# Altium PCB CM4IOv5.PcbDoc (part 1 of 4)
Units mm, origin at the board's own origin, x right, y up, seen from the top; angles counter-clockwise.
Board outline 160 x 90 mm, 4 copper layers (F.Cu, In1.Cu, In2.Cu, B.Cu); 151 components, 247 nets, 944 pads, 782 vias.
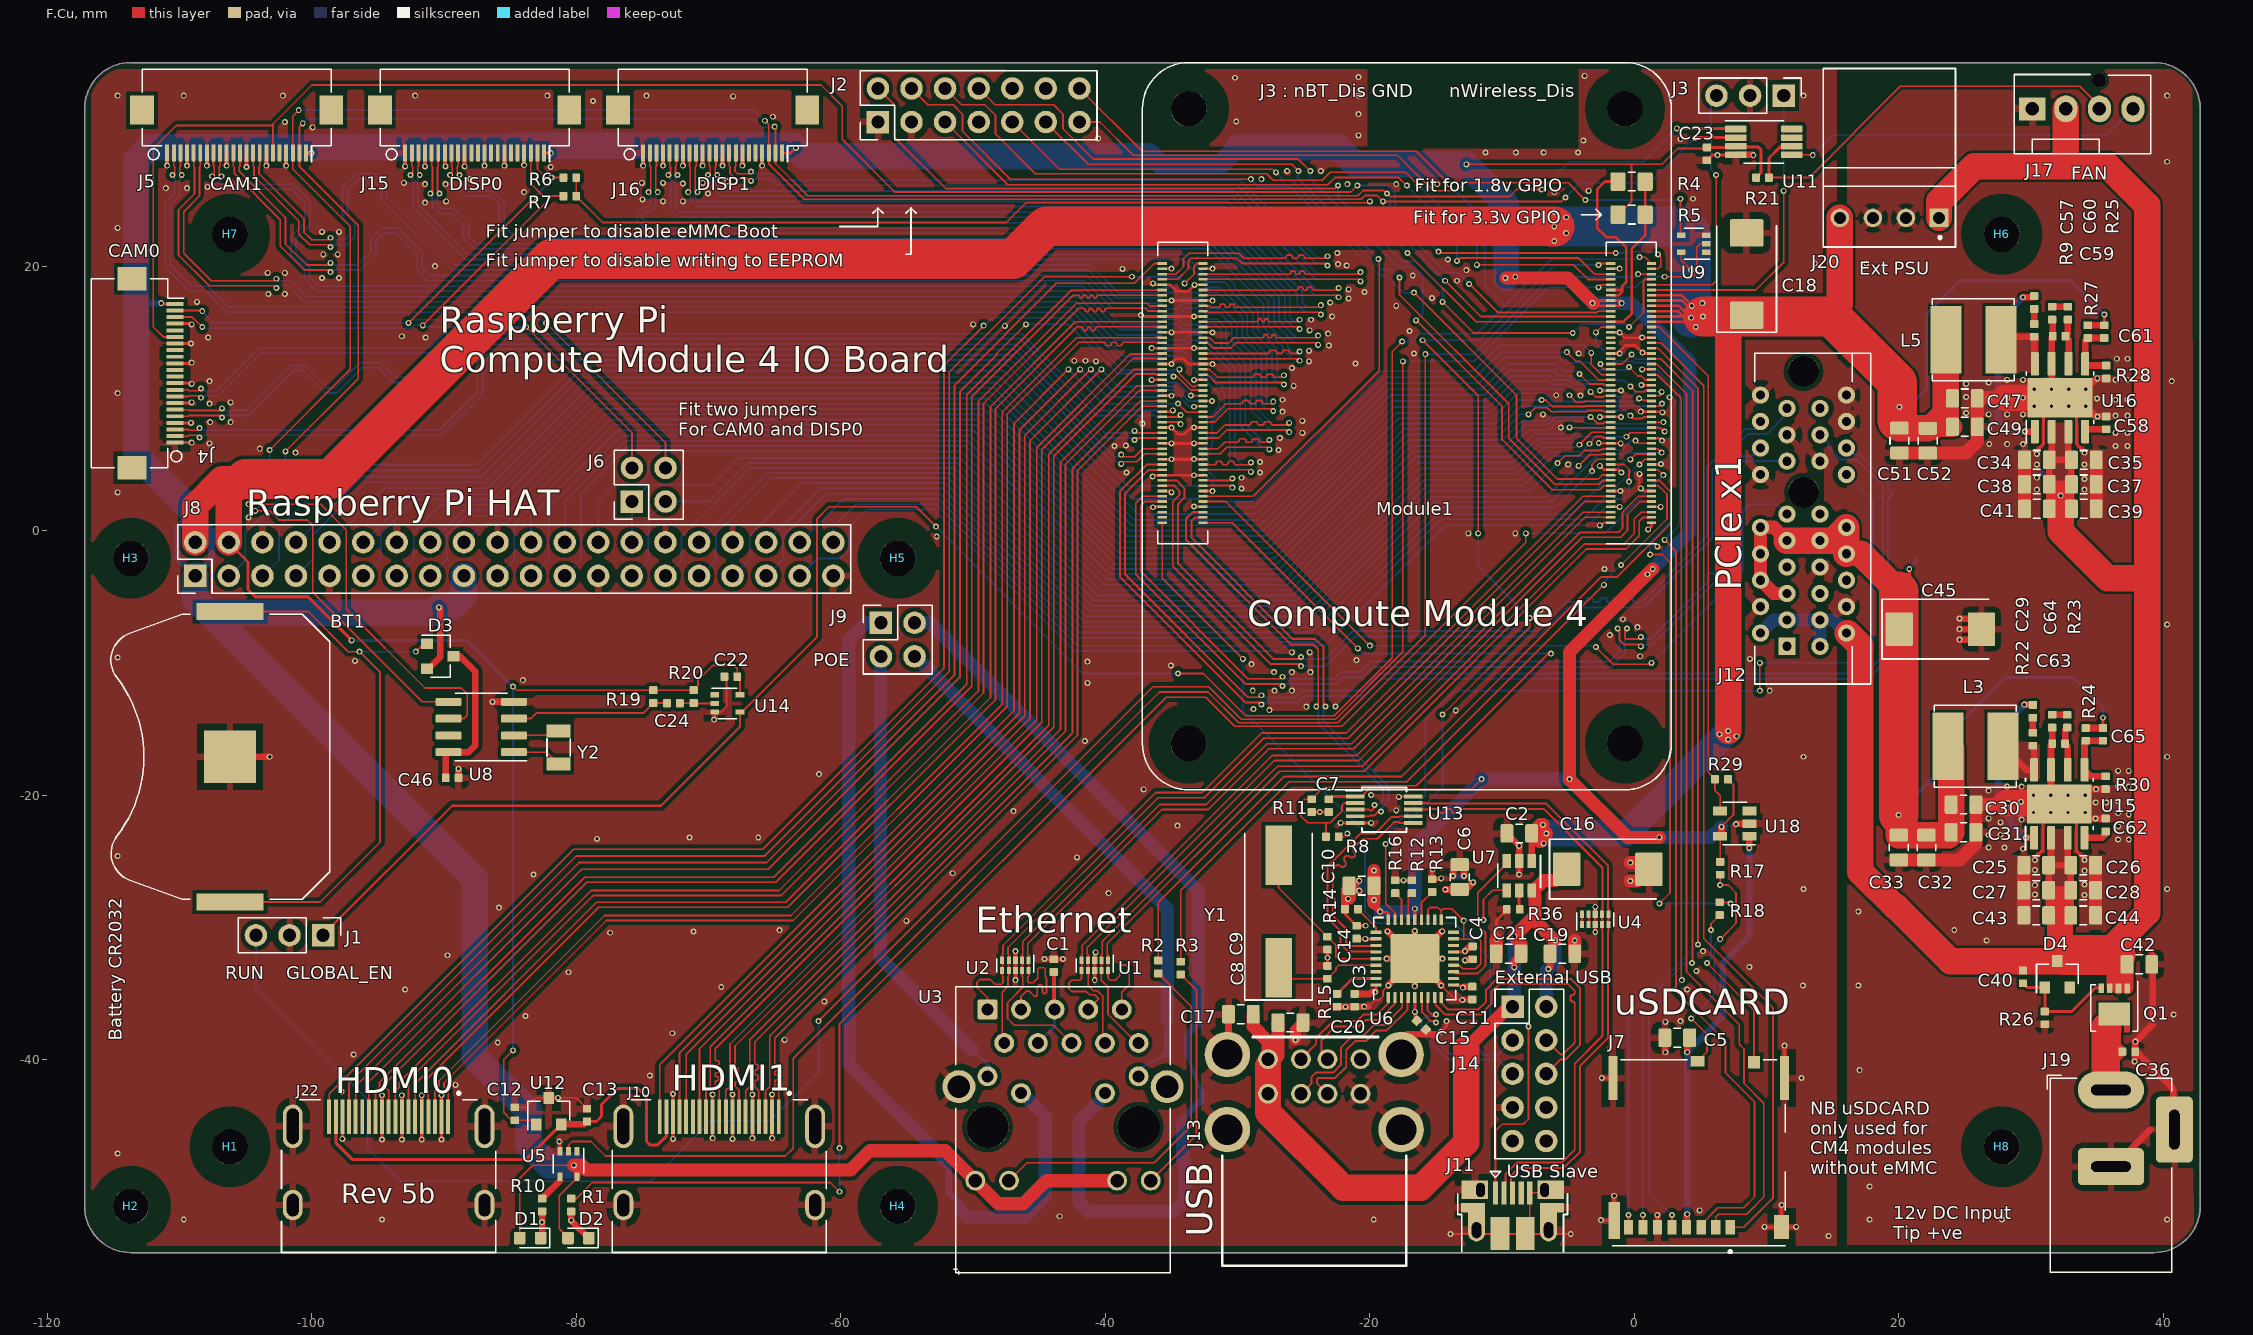
[diagram p0: F.Cu view]
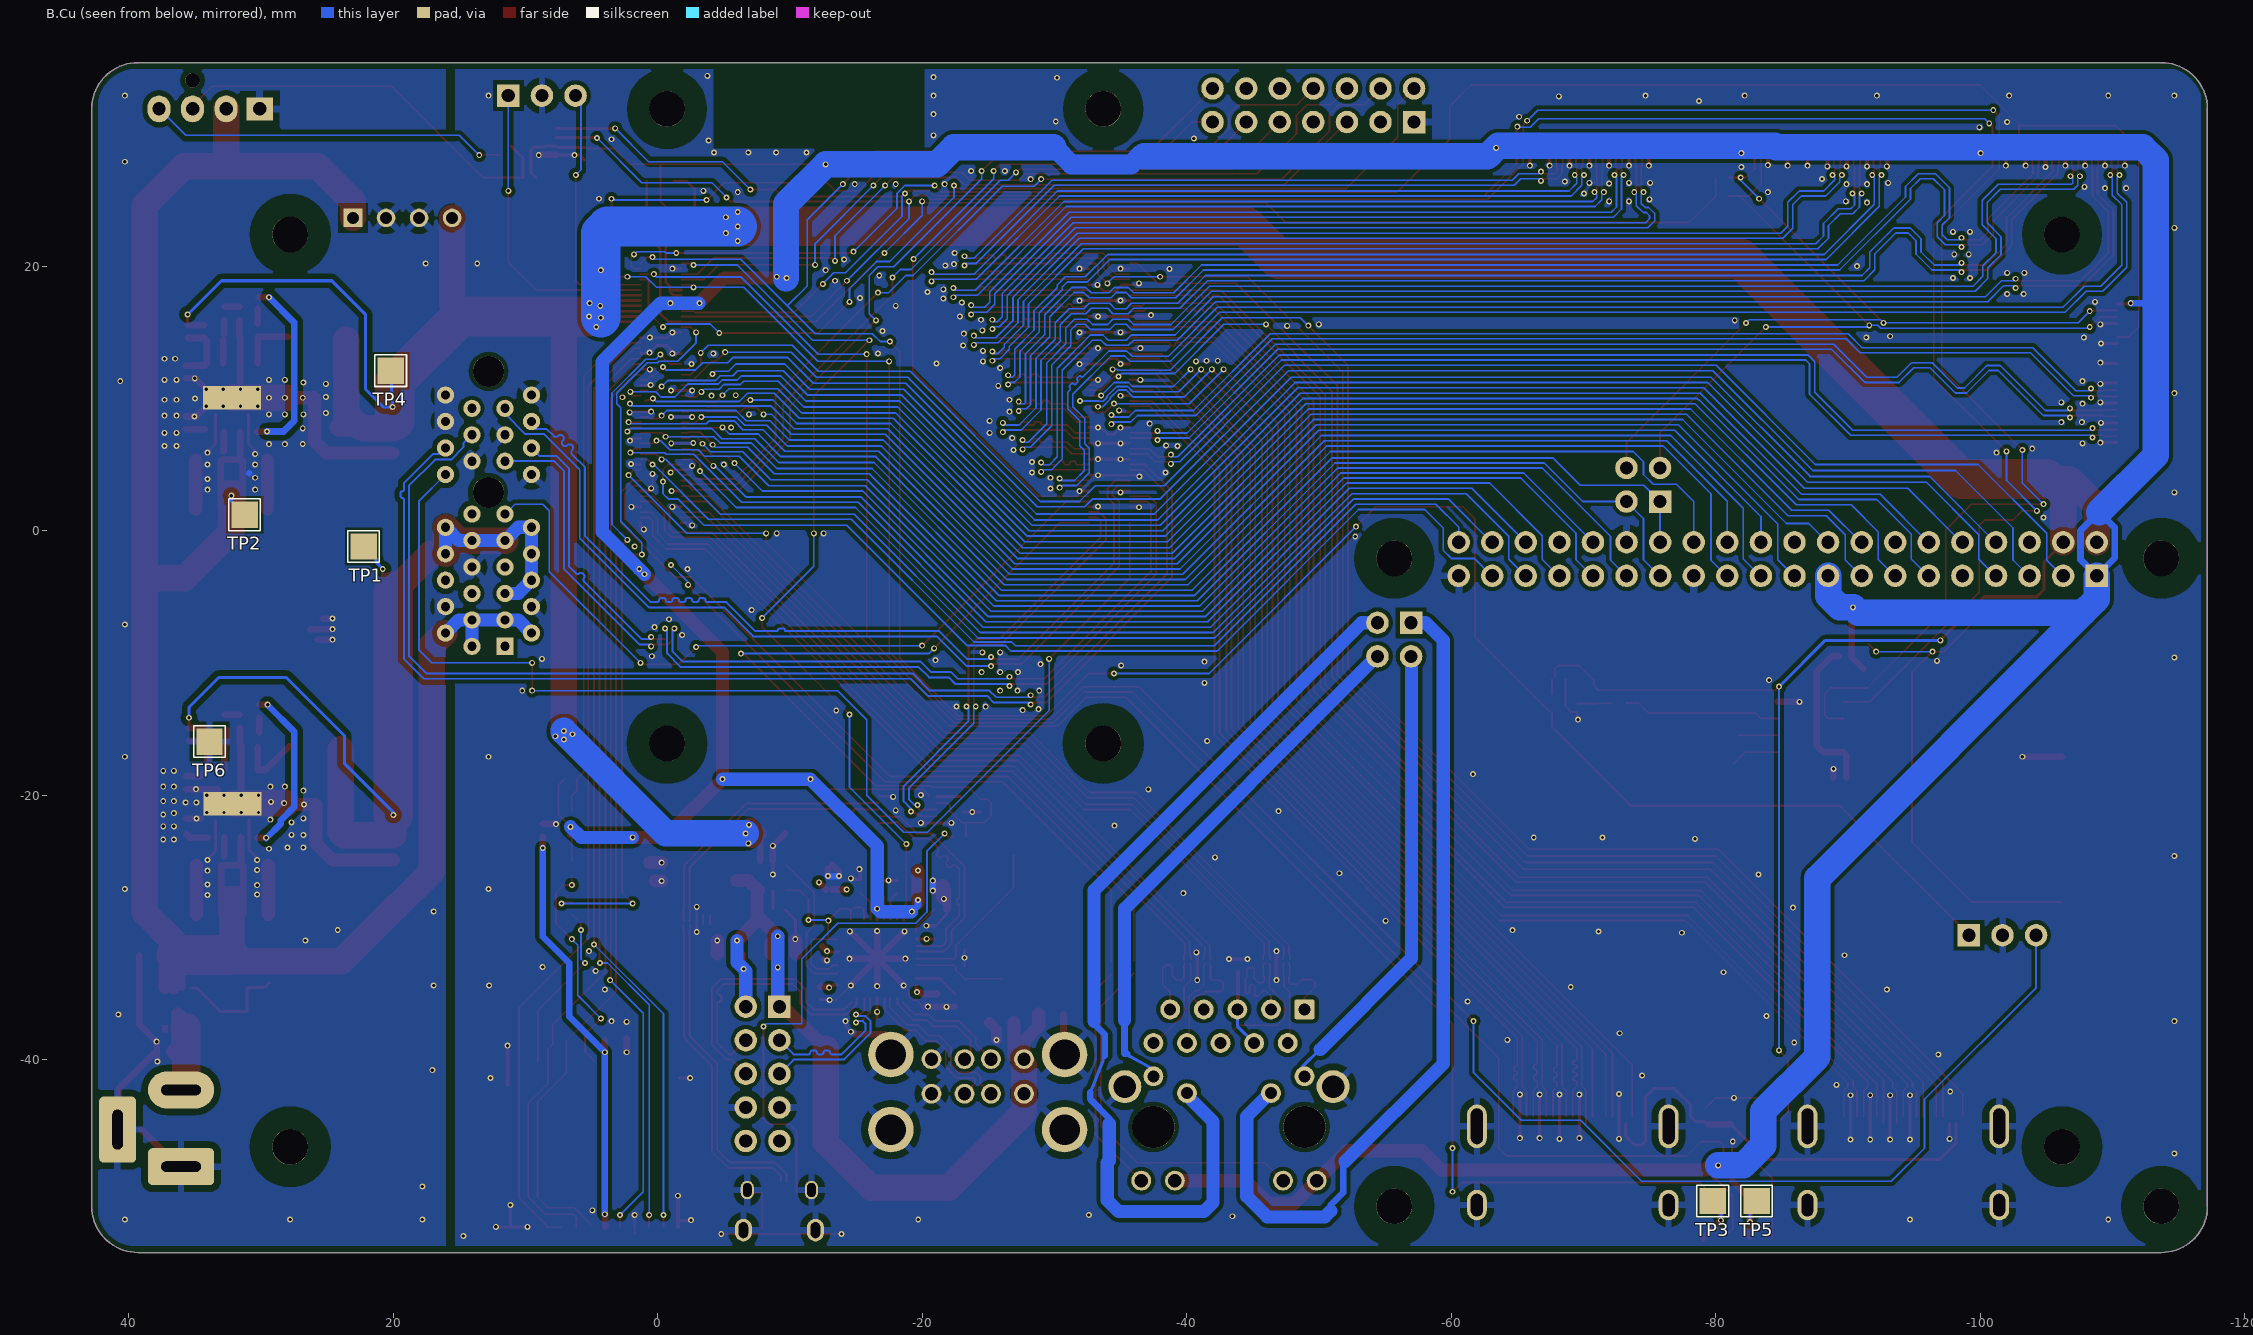
[diagram p1: B.Cu view, seen from below]
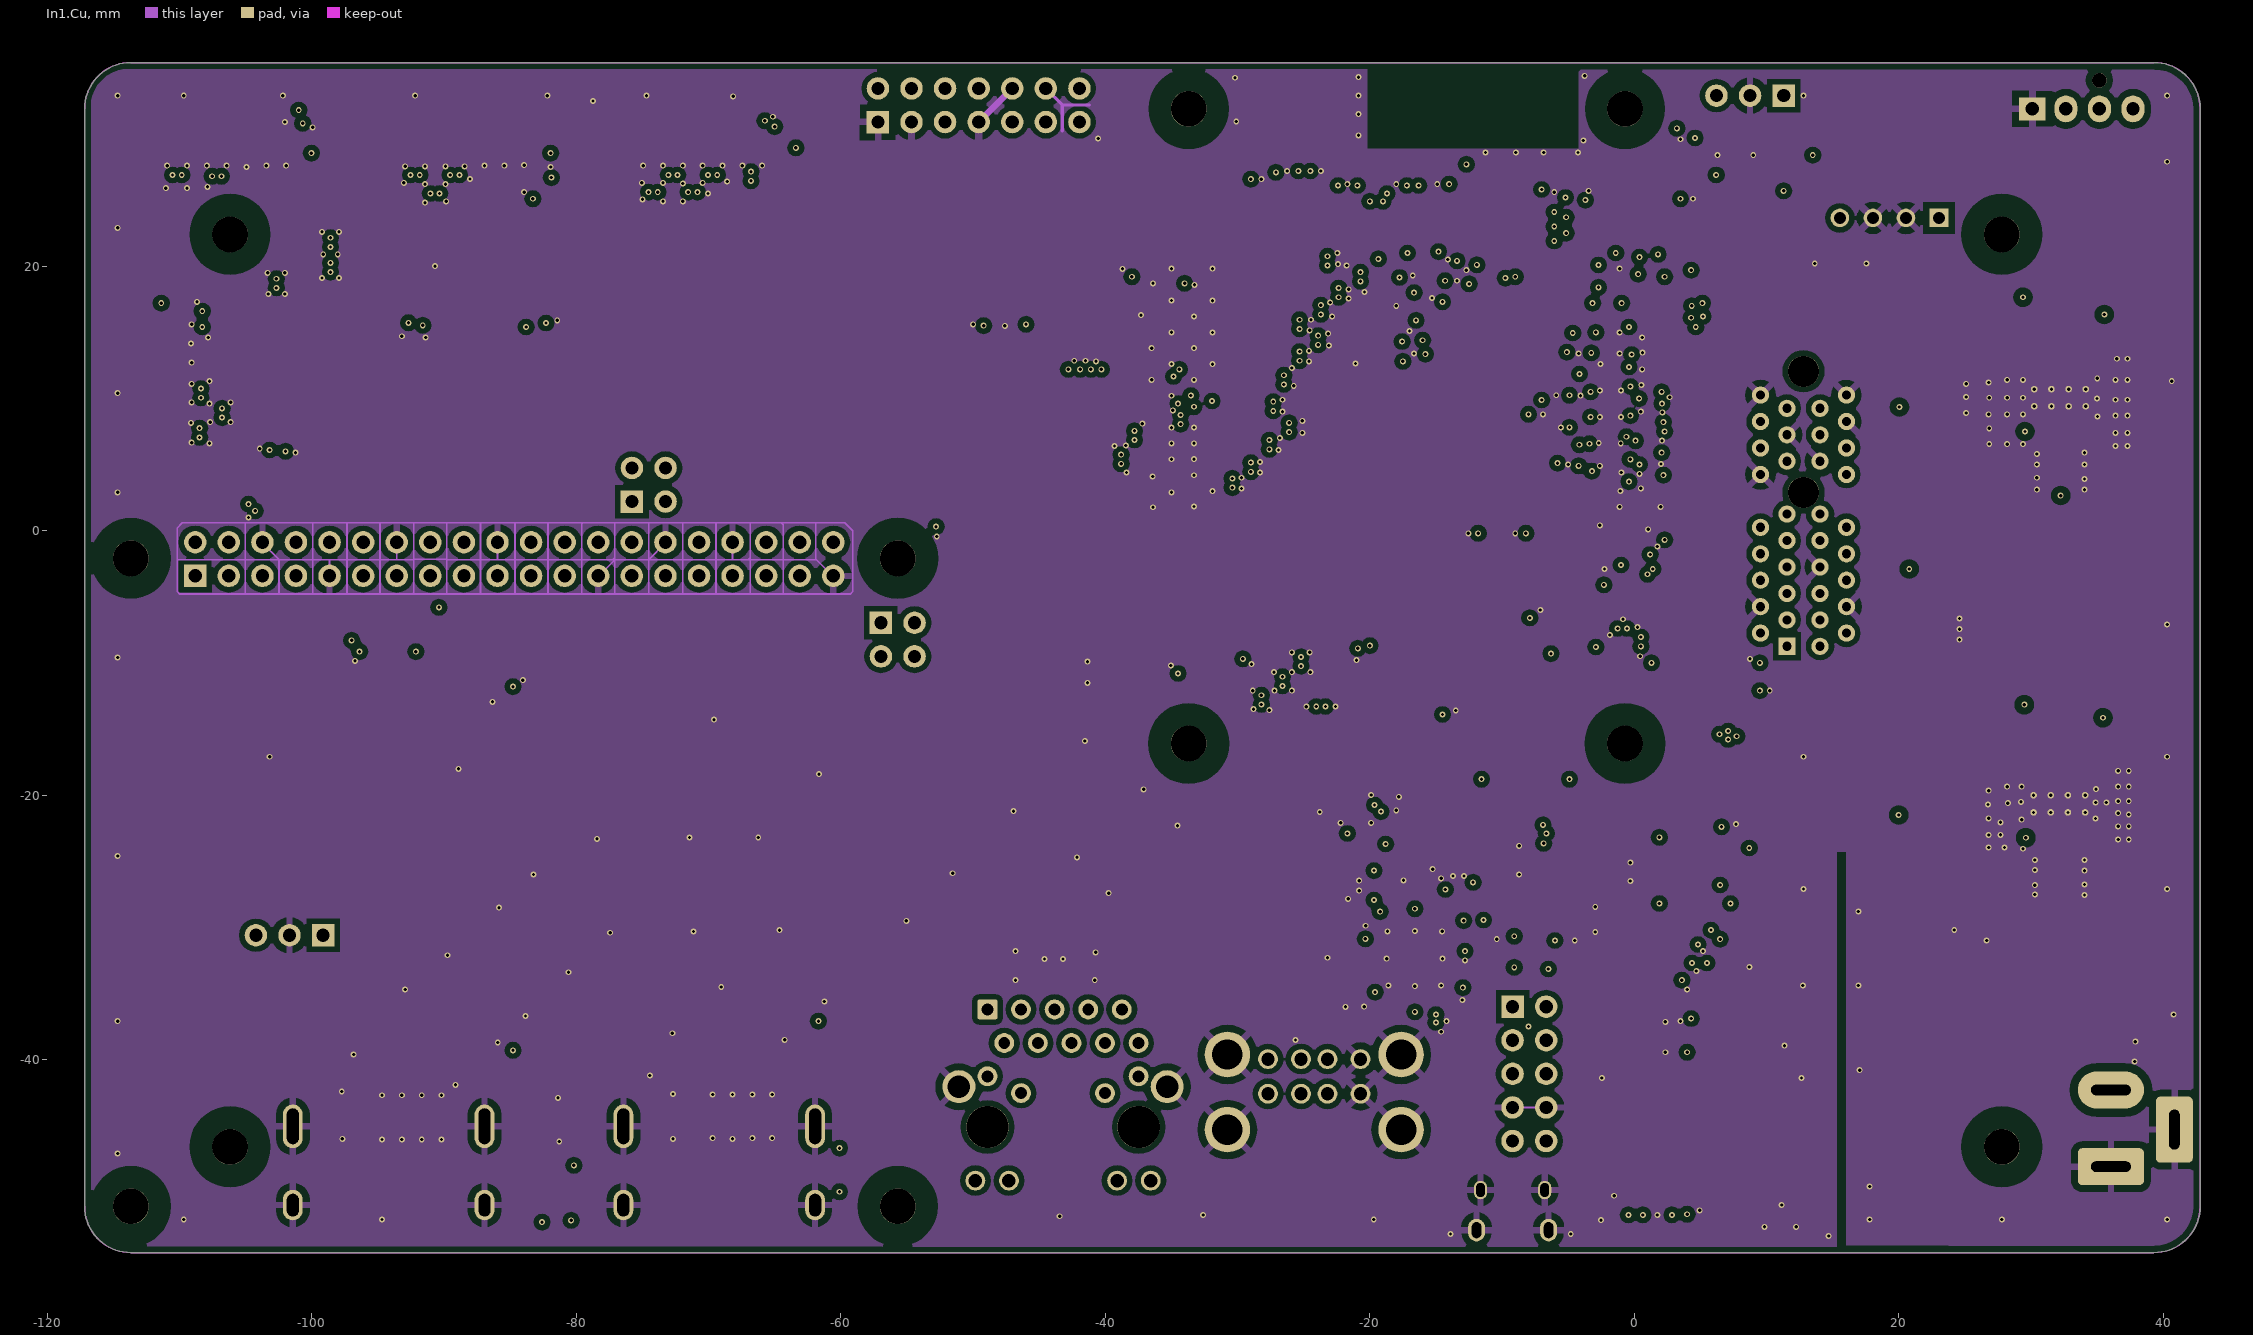
[diagram p2: In1.Cu]
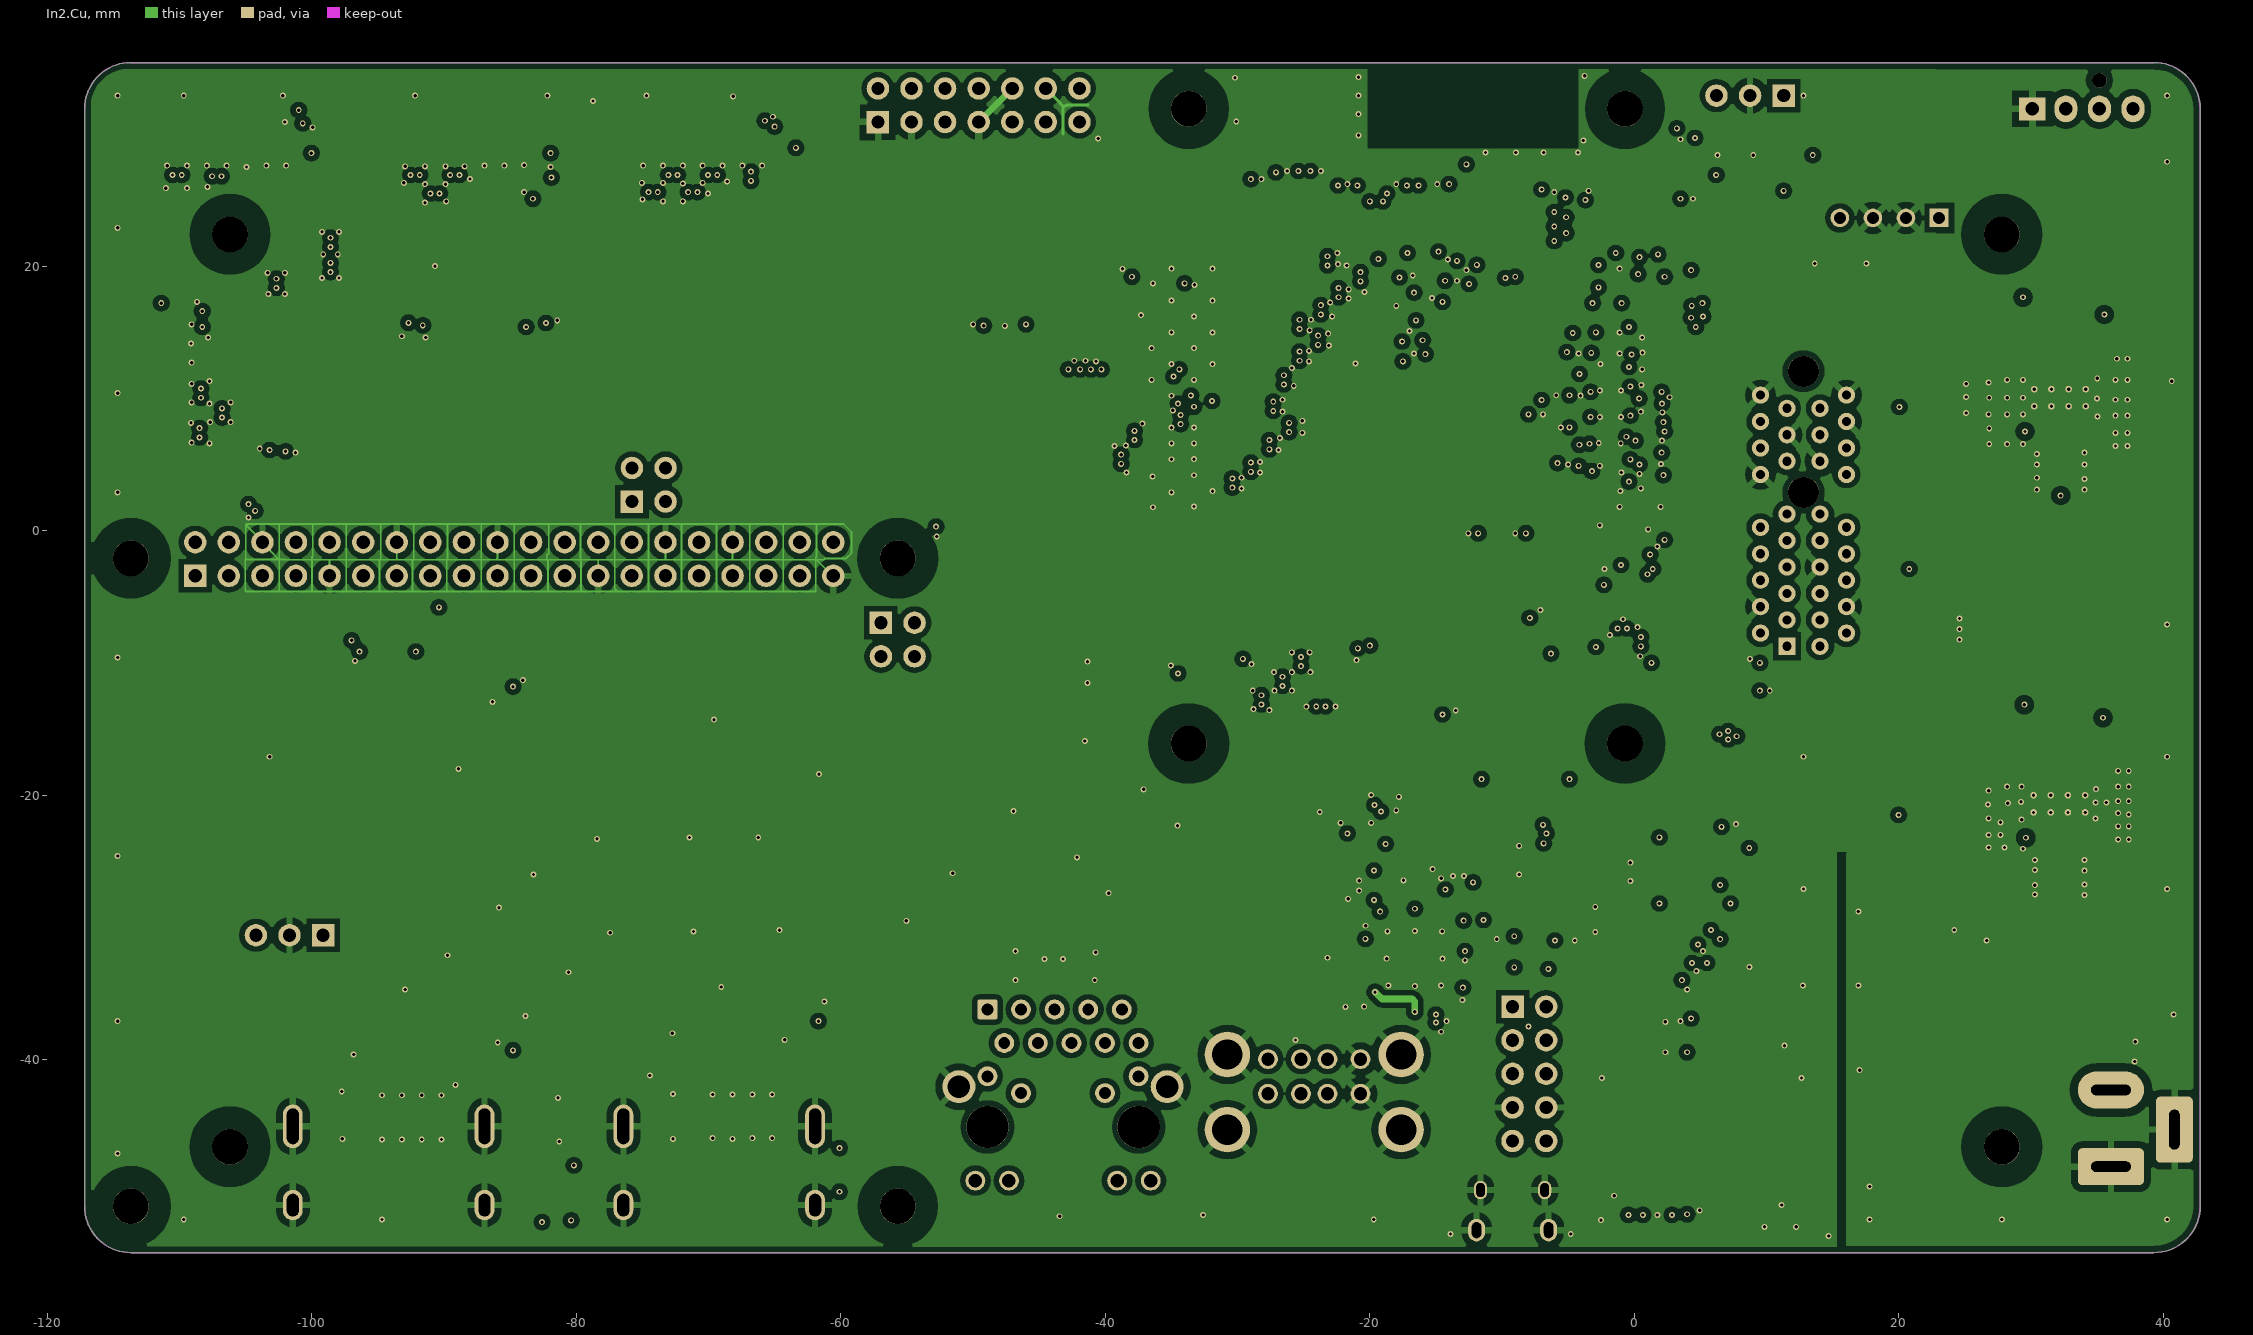
[diagram p3: In2.Cu]

## Layer stack, top to bottom
F.Mask: solder mask 0.0102, Solder Resist, Dk 3.5
F.Cu: signal copper 0.0356
Dielectric 1: dielectric 0.32, FR-4, Dk 4.8
In1.Cu: signal copper 0.0356
Dielectric2: dielectric 0.32, FR-4, Dk 4.8
In2.Cu: signal copper 0.0356
Dielectric3: dielectric 0.32, FR-4, Dk 4.8
B.Cu: signal copper 0.0356
B.Mask: solder mask 0.0102, Solder Resist, Dk 3.5

## Board outline
42.8,-51.1 42.8,31.9 ccw(c39.3,31.9) 39.3,35.4 -113.7,35.4 ccw(c-113.7,31.9) -117.2,31.9 -117.2,-51.1 ccw(c-113.7,-51.1) -113.7,-54.6 39.3,-54.6 ccw(c39.3,-51.1) 42.8,-51.1

## Design rules (kind name [scope] priority, off if disabled: settings)
Clearance "Clearence 1.7_PadClass" [InPadClass('Pad Class Clearance 1.7')] p1: gap=1.7 ignorepadtopadclearanceinfootprint=FALSE
Clearance "Clearence 0.5_Polygon" [InNamedPolygon('In1.Cu-GND') OR InNamedPolygon('In2.Cu-GND')] p2: gap=0.5 ignorepadtopadclearanceinfootprint=FALSE
Clearance "Clearence 0.4_Polygon" [InNamedPolygon('F.Cu-Net-(L5-Pad1)') OR InNamedPolygon('F.Cu-GND') OR InNamedPolygon('F.Cu-Net-(L3-Pad1)') OR InNamedPolygon('F.Cu-/+12v') OR InNamedPolygon('F.Cu-/+12v-1') OR InNamedPolygon('F.Cu-GND-1') OR InNamedPolygon('F.Cu-GND-2') OR InNamedPolygon('F.Cu-GND-4') OR InNamedPolygon('F.Cu-GND-5') OR InNamedPolygon('F.Cu-GND-6') OR InNamedPolygon('F.Cu-GND-8') OR InNamedPolygon('In1.Cu-GND-1') OR InNamedPolygon('In1.Cu-GND-2') OR InNamedPolygon('In1.Cu-GND-3') OR InNamedPolygon('In2.Cu-GND-1') OR InNamedPolygon('In2.Cu-GND-2') OR InNamedPolygon('In2.Cu-/+3.3v') OR InNamedPolygon('In2.Cu-GND-3') OR InNamedPolygon('B.Cu-GND') OR InNamedPolygon('B.Cu-GND-1') OR InNamedPolygon('B.Cu-GND-3') OR InNamedPolygon('B.Cu-GND-4')] p3: gap=0.4 ignorepadtopadclearanceinfootprint=FALSE
Clearance "Clearence 0.3_Polygon" [InNamedPolygon('F.Cu-GND-7') OR InNamedPolygon('B.Cu-GND-2')] p4: gap=0.3 ignorepadtopadclearanceinfootprint=FALSE
Clearance "Clearence 0.2_Polygon" [InNamedPolygon('F.Cu-GND-3')] p5: gap=0.2 ignorepadtopadclearanceinfootprint=FALSE
MinimumSolderMaskSliver [All] p1: minsoldermaskwidth=0
PolygonConnect Polygon_B.Cu-GND-4_ConnectDirect [IsNamedPolygon('B.Cu-GND-4')] p1: connectstyle=Direct reliefconductorwidth=0.254 reliefentries=4 polygonreliefangle="90 Angle" airgapwidth=0.254
PolygonConnect Polygon_B.Cu-GND-3_ConnectDirect [IsNamedPolygon('B.Cu-GND-3')] p2: connectstyle=Direct reliefconductorwidth=0.254 reliefentries=4 polygonreliefangle="90 Angle" airgapwidth=0.254
PolygonConnect Polygon_B.Cu-GND-2_ConnectDirect [IsNamedPolygon('B.Cu-GND-2') vs IsVia] p3: connectstyle=Direct reliefconductorwidth=0.254 reliefentries=4 polygonreliefangle="90 Angle" airgapwidth=0.254
PolygonConnect Polygon_B.Cu-GND-2_ConnectRelief45 [IsNamedPolygon('B.Cu-GND-2') vs (IsThruPin or IsSMTPin) and (PadShape_AllLayers = 'Round')] p4: connectstyle=Relief reliefconductorwidth=0.508 reliefentries=4 polygonreliefangle="45 Angle" airgapwidth=0.508
PolygonConnect Polygon_B.Cu-GND-2_ConnectRelief90 [IsNamedPolygon('B.Cu-GND-2') vs (IsThruPin or IsSMTPin) and (PadShape_AllLayers <> 'Round')] p5: connectstyle=Relief reliefconductorwidth=0.508 reliefentries=4 polygonreliefangle="90 Angle" airgapwidth=0.508
PolygonConnect Polygon_B.Cu-GND-1_ConnectDirect [IsNamedPolygon('B.Cu-GND-1')] p6: connectstyle=Direct reliefconductorwidth=0.254 reliefentries=4 polygonreliefangle="90 Angle" airgapwidth=0.254
PolygonConnect Polygon_B.Cu-GND_ConnectDirect [IsNamedPolygon('B.Cu-GND') vs IsVia] p7: connectstyle=Direct reliefconductorwidth=0.254 reliefentries=4 polygonreliefangle="90 Angle" airgapwidth=0.254
PolygonConnect Polygon_B.Cu-GND_ConnectRelief45 [IsNamedPolygon('B.Cu-GND') vs (IsThruPin or IsSMTPin) and (PadShape_AllLayers = 'Round')] p8: connectstyle=Relief reliefconductorwidth=0.508 reliefentries=4 polygonreliefangle="45 Angle" airgapwidth=0.508
PolygonConnect Polygon_B.Cu-GND_ConnectRelief90 [IsNamedPolygon('B.Cu-GND') vs (IsThruPin or IsSMTPin) and (PadShape_AllLayers <> 'Round')] p9: connectstyle=Relief reliefconductorwidth=0.508 reliefentries=4 polygonreliefangle="90 Angle" airgapwidth=0.508
PolygonConnect Polygon_In2.Cu-GND-3_ConnectDirect [IsNamedPolygon('In2.Cu-GND-3')] p10: connectstyle=Direct reliefconductorwidth=0.254 reliefentries=4 polygonreliefangle="90 Angle" airgapwidth=0.254
PolygonConnect Polygon_In2.Cu-/+3.3v_ConnectDirect [IsNamedPolygon('In2.Cu-/+3.3v') vs IsVia] p11: connectstyle=Direct reliefconductorwidth=0.254 reliefentries=4 polygonreliefangle="90 Angle" airgapwidth=0.254
PolygonConnect Polygon_In2.Cu-/+3.3v_ConnectRelief45 [IsNamedPolygon('In2.Cu-/+3.3v') vs (IsThruPin or IsSMTPin) and (PadShape_AllLayers = 'Round')] p12: connectstyle=Relief reliefconductorwidth=0.508 reliefentries=4 polygonreliefangle="45 Angle" airgapwidth=0.508
PolygonConnect Polygon_In2.Cu-/+3.3v_ConnectRelief90 [IsNamedPolygon('In2.Cu-/+3.3v') vs (IsThruPin or IsSMTPin) and (PadShape_AllLayers <> 'Round')] p13: connectstyle=Relief reliefconductorwidth=0.508 reliefentries=4 polygonreliefangle="90 Angle" airgapwidth=0.508
PolygonConnect Polygon_In2.Cu-GND-2_ConnectDirect [IsNamedPolygon('In2.Cu-GND-2')] p14: connectstyle=Direct reliefconductorwidth=0.254 reliefentries=4 polygonreliefangle="90 Angle" airgapwidth=0.254
PolygonConnect Polygon_In2.Cu-GND-1_ConnectDirect [IsNamedPolygon('In2.Cu-GND-1') vs IsVia] p15: connectstyle=Direct reliefconductorwidth=0.254 reliefentries=4 polygonreliefangle="90 Angle" airgapwidth=0.254
PolygonConnect Polygon_In2.Cu-GND-1_ConnectRelief45 [IsNamedPolygon('In2.Cu-GND-1') vs (IsThruPin or IsSMTPin) and (PadShape_AllLayers = 'Round')] p16: connectstyle=Relief reliefconductorwidth=0.508 reliefentries=4 polygonreliefangle="45 Angle" airgapwidth=0.508
PolygonConnect Polygon_In2.Cu-GND-1_ConnectRelief90 [IsNamedPolygon('In2.Cu-GND-1') vs (IsThruPin or IsSMTPin) and (PadShape_AllLayers <> 'Round')] p17: connectstyle=Relief reliefconductorwidth=0.508 reliefentries=4 polygonreliefangle="90 Angle" airgapwidth=0.508
PolygonConnect Polygon_In2.Cu-GND_ConnectDirect [IsNamedPolygon('In2.Cu-GND') vs IsVia] p18: connectstyle=Direct reliefconductorwidth=0.254 reliefentries=4 polygonreliefangle="90 Angle" airgapwidth=0.254
PolygonConnect Polygon_In2.Cu-GND_ConnectRelief45 [IsNamedPolygon('In2.Cu-GND') vs (IsThruPin or IsSMTPin) and (PadShape_AllLayers = 'Round')] p19: connectstyle=Relief reliefconductorwidth=0.508 reliefentries=4 polygonreliefangle="45 Angle" airgapwidth=0.508
PolygonConnect Polygon_In2.Cu-GND_ConnectRelief90 [IsNamedPolygon('In2.Cu-GND') vs (IsThruPin or IsSMTPin) and (PadShape_AllLayers <> 'Round')] p20: connectstyle=Relief reliefconductorwidth=0.508 reliefentries=4 polygonreliefangle="90 Angle" airgapwidth=0.508
PolygonConnect Polygon_In1.Cu-GND-3_ConnectDirect [IsNamedPolygon('In1.Cu-GND-3') vs IsVia] p21: connectstyle=Direct reliefconductorwidth=0.254 reliefentries=4 polygonreliefangle="90 Angle" airgapwidth=0.254
PolygonConnect Polygon_In1.Cu-GND-3_ConnectRelief45 [IsNamedPolygon('In1.Cu-GND-3') vs (IsThruPin or IsSMTPin) and (PadShape_AllLayers = 'Round')] p22: connectstyle=Relief reliefconductorwidth=0.508 reliefentries=4 polygonreliefangle="45 Angle" airgapwidth=0.508
PolygonConnect Polygon_In1.Cu-GND-3_ConnectRelief90 [IsNamedPolygon('In1.Cu-GND-3') vs (IsThruPin or IsSMTPin) and (PadShape_AllLayers <> 'Round')] p23: connectstyle=Relief reliefconductorwidth=0.508 reliefentries=4 polygonreliefangle="90 Angle" airgapwidth=0.508
PolygonConnect Polygon_In1.Cu-GND-2_ConnectDirect [IsNamedPolygon('In1.Cu-GND-2')] p24: connectstyle=Direct reliefconductorwidth=0.254 reliefentries=4 polygonreliefangle="90 Angle" airgapwidth=0.254
PolygonConnect Polygon_In1.Cu-GND-1_ConnectDirect [IsNamedPolygon('In1.Cu-GND-1')] p25: connectstyle=Direct reliefconductorwidth=0.254 reliefentries=4 polygonreliefangle="90 Angle" airgapwidth=0.254
PolygonConnect Polygon_In1.Cu-GND_ConnectDirect [IsNamedPolygon('In1.Cu-GND') vs IsVia] p26: connectstyle=Direct reliefconductorwidth=0.254 reliefentries=4 polygonreliefangle="90 Angle" airgapwidth=0.254
PolygonConnect Polygon_In1.Cu-GND_ConnectRelief45 [IsNamedPolygon('In1.Cu-GND') vs (IsThruPin or IsSMTPin) and (PadShape_AllLayers = 'Round')] p27: connectstyle=Relief reliefconductorwidth=0.508 reliefentries=4 polygonreliefangle="45 Angle" airgapwidth=0.508
PolygonConnect Polygon_In1.Cu-GND_ConnectRelief90 [IsNamedPolygon('In1.Cu-GND') vs (IsThruPin or IsSMTPin) and (PadShape_AllLayers <> 'Round')] p28: connectstyle=Relief reliefconductorwidth=0.508 reliefentries=4 polygonreliefangle="90 Angle" airgapwidth=0.508
PolygonConnect Polygon_F.Cu-GND-8_ConnectDirect [IsNamedPolygon('F.Cu-GND-8')] p29: connectstyle=Direct reliefconductorwidth=0.254 reliefentries=4 polygonreliefangle="90 Angle" airgapwidth=0.254
PolygonConnect Polygon_F.Cu-GND-7_ConnectDirect [IsNamedPolygon('F.Cu-GND-7') vs IsVia] p30: connectstyle=Direct reliefconductorwidth=0.254 reliefentries=4 polygonreliefangle="90 Angle" airgapwidth=0.254
PolygonConnect Polygon_F.Cu-GND-7_ConnectRelief45 [IsNamedPolygon('F.Cu-GND-7') vs (IsThruPin or IsSMTPin) and (PadShape_AllLayers = 'Round')] p31: connectstyle=Relief reliefconductorwidth=0.508 reliefentries=4 polygonreliefangle="45 Angle" airgapwidth=0.508
PolygonConnect Polygon_F.Cu-GND-7_ConnectRelief90 [IsNamedPolygon('F.Cu-GND-7') vs (IsThruPin or IsSMTPin) and (PadShape_AllLayers <> 'Round')] p32: connectstyle=Relief reliefconductorwidth=0.508 reliefentries=4 polygonreliefangle="90 Angle" airgapwidth=0.508
PolygonConnect Polygon_F.Cu-GND-6_ConnectDirect [IsNamedPolygon('F.Cu-GND-6')] p33: connectstyle=Direct reliefconductorwidth=0.254 reliefentries=4 polygonreliefangle="90 Angle" airgapwidth=0.254
PolygonConnect Polygon_F.Cu-GND-5_ConnectDirect [IsNamedPolygon('F.Cu-GND-5')] p34: connectstyle=Direct reliefconductorwidth=0.254 reliefentries=4 polygonreliefangle="90 Angle" airgapwidth=0.254
PolygonConnect Polygon_F.Cu-GND-4_ConnectDirect [IsNamedPolygon('F.Cu-GND-4')] p35: connectstyle=Direct reliefconductorwidth=0.254 reliefentries=4 polygonreliefangle="90 Angle" airgapwidth=0.254
PolygonConnect Polygon_F.Cu-GND-3_ConnectDirect [IsNamedPolygon('F.Cu-GND-3') vs IsVia] p36: connectstyle=Direct reliefconductorwidth=0.254 reliefentries=4 polygonreliefangle="90 Angle" airgapwidth=0.254
PolygonConnect Polygon_F.Cu-GND-3_ConnectRelief45 [IsNamedPolygon('F.Cu-GND-3') vs (IsThruPin or IsSMTPin) and (PadShape_AllLayers = 'Round')] p37: connectstyle=Relief reliefconductorwidth=0.508 reliefentries=4 polygonreliefangle="45 Angle" airgapwidth=0.4
PolygonConnect Polygon_F.Cu-GND-3_ConnectRelief90 [IsNamedPolygon('F.Cu-GND-3') vs (IsThruPin or IsSMTPin) and (PadShape_AllLayers <> 'Round')] p38: connectstyle=Relief reliefconductorwidth=0.508 reliefentries=4 polygonreliefangle="90 Angle" airgapwidth=0.4
PolygonConnect Polygon_F.Cu-GND-2_ConnectDirect [IsNamedPolygon('F.Cu-GND-2')] p39: connectstyle=Direct reliefconductorwidth=0.254 reliefentries=4 polygonreliefangle="90 Angle" airgapwidth=0.254
PolygonConnect Polygon_F.Cu-GND-1_ConnectDirect [IsNamedPolygon('F.Cu-GND-1')] p40: connectstyle=Direct reliefconductorwidth=0.254 reliefentries=4 polygonreliefangle="90 Angle" airgapwidth=0.254
PolygonConnect Polygon_F.Cu-/+12v-1_ConnectDirect [IsNamedPolygon('F.Cu-/+12v-1')] p41: connectstyle=Direct reliefconductorwidth=0.254 reliefentries=4 polygonreliefangle="90 Angle" airgapwidth=0.254
PolygonConnect Polygon_F.Cu-/+12v_ConnectDirect [IsNamedPolygon('F.Cu-/+12v')] p42: connectstyle=Direct reliefconductorwidth=0.254 reliefentries=4 polygonreliefangle="90 Angle" airgapwidth=0.254
PolygonConnect Polygon_F.Cu-Net-(L3-Pad1)_ConnectDirect [IsNamedPolygon('F.Cu-Net-(L3-Pad1)')] p43: connectstyle=Direct reliefconductorwidth=0.254 reliefentries=4 polygonreliefangle="90 Angle" airgapwidth=0.254
PolygonConnect Polygon_F.Cu-GND_ConnectDirect [IsNamedPolygon('F.Cu-GND')] p44: connectstyle=Direct reliefconductorwidth=0.254 reliefentries=4 polygonreliefangle="90 Angle" airgapwidth=0.254
PolygonConnect Polygon_F.Cu-Net-(L5-Pad1)_ConnectDirect [IsNamedPolygon('F.Cu-Net-(L5-Pad1)')] p45: connectstyle=Direct reliefconductorwidth=0.254 reliefentries=4 polygonreliefangle="90 Angle" airgapwidth=0.254
RoutingVias [All] p1: holewidth=0.711 width=1.27 viastyle="Through Hole" minholewidth=0.711 minwidth=1.27 maxholewidth=0.711 maxwidth=1.27
SilkToSilkClearance [All] p1: silktosilkclearance=0
SilkToSolderMaskClearance [IsPad] p1: minsilkscreentomaskgap=0 clearancetoexposedcopper=TRUE
SolderMaskExpansion [All] p1: expansion=0.102 istentingtop=FALSE
Width [All] p1: maxlimit=10 minlimit=0.254 preferedwidth=0.254 minimp=50.000000 maximp=50.000000 favimp=50.000000
27 further rules are at their usual default settings.

## Classes and differential pairs
pad class "Pad Class Clearance 1.7": H1-Un1 H2-Un1 H3-Un1 H4-Un1 H5-Un1 H6-Un1 H7-Un1 H8-Un1 Module1-Un1 Module1-Un2 Module1-Un3 Module1-Un4

## Components (designator, comment, footprint, x,y, rotation, side; value= is the part's Value field where it differs from the comment)
BT1 "Battery_Cell" BatteryHolder_Keystone_3034_1x20mm -106.2,-17.1 r270 top
C1 "100n" C_0402_1005Metric -43.9,-32.9 r90 top
C2 "10u" C_0805_2012Metric -8.7,-22.9 r180 top
C3 "100n" C_0402_1005Metric -21.15,-35.525 r270 top
C4 "100n" C_0402_1005Metric -12.225,-31.925 r270 top
C5 "10u" C_0805_2012Metric 3.25,-38.35 r180 top
C6 "10u" C_0805_2012Metric -13.2,-26.2 r90 top
C7 "100n" C_0402_1005Metric -23.1,-20.8 r270 top
C8 "27pF" C_0402_1005Metric -23.2,-33.4 r90 top
C9 "27pF" C_0402_1005Metric -23.2,-31.2 r270 top
C10 "10u" C_0805_2012Metric -20.622,-26.844 r180 top
C11 "100n" C_0402_1005Metric -12.24,-34.972 r270 top
C12 "100n" C_0402_1005Metric -84.65,-44.1 r90 top
C13 "100n" C_0402_1005Metric -79.2,-44.2 r90 top
C14 "100n" C_0402_1005Metric -20.996,-30.368 r90 top
C15 "100n" C_0402_1005Metric -16.1,-37.4 r315 top
C16 "100uF" CP_EIA-7343-31_Kemet-D -2,-25.6 r0 top
C17 "10u" C_0805_2012Metric -29.75,-36.573 r180 top
C18 "100uF" CP_EIA-7343-31_Kemet-D 8.5,19.4 r90 top
C19 "10u" C_0805_2012Metric -5.437,-32 r0 top
C20 "10u" C_0805_2012Metric -26,-37.2 r0 top
C21 "10u" C_0805_2012Metric -9.5,-32 r180 top
C22 "100n" C_0402_1005Metric -68.328,-11.04 r180 top
C23 "100n" C_0402_1005Metric 5.5,28.5 r270 top
C24 "100n" C_0402_1005Metric -72.662,-13.056 r180 top
C25 "10u 35v" C_0805_2012Metric 30.4,-25.3 r180 top
C26 "10u 35v" C_0805_2012Metric 33.95,-25.3 r0 top
C27 "10u 35v" C_0805_2012Metric 30.4,-27.2 r180 top
C28 "10u 35v" C_0805_2012Metric 33.95,-27.2 r0 top
C29 "100n" C_0402_1005Metric 30.15,-13.662 r90 top
C30 "10u" C_0805_2012Metric 24.9,-20.713 r0 top
C31 "10u" C_0805_2012Metric 24.9,-22.812 r0 top
C32 "10u" C_0805_2012Metric 22.1,-23.962 r270 top
C33 "10u" C_0805_2012Metric 20,-23.962 r270 top
C34 "10u 35v" C_0805_2012Metric 30.45,5.35 r180 top
C35 "10u 35v" C_0805_2012Metric 34,5.35 r0 top
C36 "100n 100v" C_0402_1005Metric 37.4,-39.4 r0 top
C37 "10u 35v" C_0805_2012Metric 34,3.5 r0 top
C38 "10u 35v" C_0805_2012Metric 30.45,3.5 r180 top
C39 "10u 35v" C_0805_2012Metric 34,1.65 r0 top
C40 "100n" C_0402_1005Metric 29.4,-33.75 r270 top
C41 "10u 35v" C_0805_2012Metric 30.45,1.65 r180 top
C42 "10u 35v" C_0805_2012Metric 38.2,-32.8 r0 top
C43 "10u 35v" C_0805_2012Metric 30.4,-29.1 r180 top
C44 "10u 35v" C_0805_2012Metric 33.95,-29.1 r0 top
C45 "100uF" CP_EIA-7343-31_Kemet-D 23.15,-7.45 r0 top
C46 "100n" C_0402_1005Metric -89.4,-18.7 r0 top
C47 "10u" C_0805_2012Metric 25,10 r0 top
C49 "10u" C_0805_2012Metric 25,7.85 r0 top
C51 "10u" C_0805_2012Metric 20.05,6.813 r270 top
C52 "10u" C_0805_2012Metric 22.2,6.8 r270 top
C57 "100n" C_0402_1005Metric 30.25,17.25 r90 top
C58 "100n" C_0402_1005Metric 35.7,8.15 r90 top
C59 "nf" C_0402_1005Metric 32.135,14.7 r180 top
C60 "1.2nF" C_0402_1005Metric 31.6,16.45 r270 top
C61 "nf" C_0402_1005Metric 35.55,15.05 r270 top
C62 "100n" C_0402_1005Metric 35.65,-22.263 r90 top
C63 "nf" C_0402_1005Metric 32.1,-16.113 r180 top
C64 "1.2nF" C_0402_1005Metric 31.6,-14.413 r270 top
C65 "nf" C_0402_1005Metric 35.45,-15.412 r270 top
D1 "LED Red" LED_0603_1608Metric -83.5,-53.5 r180 top
D2 "LED Green" LED_0603_1608Metric -79.85,-53.5 r180 top
D3 "BAT54C-7-F" SOT-23 -90.3,-9.5 r0 top
D4 "MMBZ5242BLT3G" D_SOT-23_ANK 32,-33.55 r90 top
H1 "MountingHole" MountingHole_2.7mm_M2.5 -106.2,-46.6 r0 top
H2 "MountingHole" MountingHole_2.7mm_M2.5 -113.7,-51.1 r0 top
H3 "MountingHole" MountingHole_2.7mm_M2.5 -113.7,-2.1 r0 top
H4 "MountingHole" MountingHole_2.7mm_M2.5 -55.7,-51.1 r0 top
H5 "MountingHole" MountingHole_2.7mm_M2.5 -55.7,-2.1 r0 top
H6 "MountingHole" MountingHole_2.7mm_M2.5 27.8,22.4 r0 top
H7 "MountingHole" MountingHole_2.7mm_M2.5 -106.2,22.4 r0 top
H8 "MountingHole" MountingHole_2.7mm_M2.5 27.8,-46.6 r0 top
J1 "Conn_01x03" PinHeader_1x03_P2.54mm_Vertical -99.16,-30.6 r270 top
J2 "Conn_02x07_Odd_Even" PinHeader_2x07_P2.54mm_Vertical -57.2,30.9 r90 top
J3 "Conn_01x03" PinHeader_1x03_P2.54mm_Vertical 11.3,32.9 r270 top
J4 "Conn_01x22_Female" Hirose_FH12-22S-0.5SH_1x22-1MP_P0.50mm_Horizontal -112.2,11.9 r270 top
J5 "Conn_01x22_Female" Hirose_FH12-22S-0.5SH_1x22-1MP_P0.50mm_Horizontal -105.7,30.4 r180 top
J6 "THD-02-R" PinHeader_2x02_P2.54mm_Vertical -75.8,2.2 r90 top
J7 "Micro_SD_Card_Det" SDCARD_MOLEX_503398-1892 4.88,-47.05 r180 top
J8 "THD-20-R" PinHeader_2x20_P2.54mm_Vertical -108.83,-3.42 r90 top
J9 "THD-02-R" PinHeader_2x02_P2.54mm_Vertical -56.97,-6.97 r0 top
J10 "690-019-298-412" "EDAC 690-019-298-412" -69.2,-45.05 r0 top
J11 "USB_OTG" USB_Micro-B_EDAC_UCON00686 -9.2,-52.9 r0 top
J12 "10018783-11200TLF" PCIex1-36 11.55,-8.75 r90 top
J13 "690-008-221-904" MOLEX_USB_67298-4090 -24.2,-45.3 r0 top
J14 "Conn_02x05_Odd_Even" PinHeader_2x05_P2.54mm_Vertical -9.2,-36 r0 top
J15 "Conn_01x22_Female" Hirose_FH12-22S-0.5SH_1x22-1MP_P0.50mm_Horizontal -87.7,30.4 r180 top
J16 "Conn_01x22_Female" Hirose_FH12-22S-0.5SH_1x22-1MP_P0.50mm_Horizontal -69.7,30.4 r180 top
J17 "Molex 470531000" FanPinHeader_1x04_P2.54mm_Vertical 30.1,31.9 r0 top
J19 "Barrel_Jack" BarrelJack_Horizontal 36.05,-42.3 r90 top
J20 "AMP171826-4" TE_171826-4 19.3,28.2 r180 top
J22 "690-019-298-412" "EDAC 690-019-298-412" -94.2,-45.05 r0 top
L3 "SRN6045TA-3R3Y" L_Bourns_SRN6045TA 25.8,-16.312 r180 top
L5 "SRN6045TA-3R3Y" L_Bourns_SRN6045TA 25.65,14.45 r180 top
Module1 "ComputeModule4" Raspberry-Pi-4-Compute-Module -0.7,31.9 r180 top
Q1 "DMP3013SFV-7" Diodes_PowerDI3333-8 36.3,-36.1 r270 top
R1 "1k" R_0402_1005Metric -80.4,-51 r90 top
R2 "470R" R_0402_1005Metric -36,-33 r90 top
R3 "470R" R_0402_1005Metric -34.3,-33.085 r90 top
R4 "nf" R_0805_2012Metric_Pad1.15x1.40mm_HandSolder -0.2,26.4 r0 top
R5 "0R" R_0805_2012Metric_Pad1.15x1.40mm_HandSolder -0.2,23.9 r0 top
R6 "2.2K 1%" R_0402_1005Metric -80.5,26.7 r180 top
R7 "2.2K 1%" R_0402_1005Metric -80.5,25.3 r180 top
R8 "2.2K 1%" R_0402_1005Metric -22.835,-23.15 r180 top
R9 "10R" R_0402_1005Metric 30.25,15.15 r90 top
R10 "1k" R_0402_1005Metric -82.6,-51 r90 top
R11 "2.2K 1%" R_0402_1005Metric -24.4,-20.8 r270 top
R12 "36K 1%" R_0402_1005Metric -16.812,-26.931 r90 top
R13 "36K 1%" R_0402_1005Metric -15.288,-26.844 r90 top
R14 "36K 1%" R_0402_1005Metric -21.384,-28.622 r180 top
R15 "12K 1%" R_0402_1005Metric -22.475,-35.525 r90 top
R16 "36K 1%" R_0402_1005Metric -18.082,-26.931 r90 top
R17 "nf" R_0402_1005Metric 6.5,-25.535 r270 top
R18 "nf" R_0402_1005Metric 6.45,-28.585 r270 top
R19 "510K 1%" R_0402_1005Metric -74.186,-12.548 r90 top
R20 "510K 1%" R_0402_1005Metric -71.138,-12.548 r90 top
R21 "36K 1%" R_0402_1005Metric 9.7,26.7 r180 top
R22 "10R" R_0402_1005Metric 30.15,-15.777 r90 top
R23 "12K 1%" R_0402_1005Metric 32.75,-14.413 r90 top
R24 "47K 1%" R_0402_1005Metric 34.15,-15.412 r270 top
R25 "20K 1%" R_0402_1005Metric 32.8,16.45 r90 top
R26 "12K 1%" R_0402_1005Metric 31.05,-36.85 r270 top
R27 "12K 1%" R_0402_1005Metric 34.3,15.05 r270 top
R28 "2.2K 1%" R_0402_1005Metric 35.7,12 r270 top
R29 "12K 1%" R_0402_1005Metric 6.6,-18.8 r180 top
R30 "15K 1%" R_0402_1005Metric 35.65,-19.062 r270 top
R36 "15K 1%" R_0402_1005Metric -9.15,-28.65 r180 top
TP1 "TestPoint" TestPoint_Pad_2.0x2.0mm 22.25,-1.2 r180 bottom
TP2 "TestPoint" TestPoint_Pad_2.0x2.0mm 31.25,1.2 r180 bottom
TP3 "TestPoint" TestPoint_Pad_2.0x2.0mm -79.788,-50.7 r180 bottom
TP4 "TestPoint" TestPoint_Pad_2.0x2.0mm 20.2,12.1 r180 bottom
TP5 "TestPoint" TestPoint_Pad_2.0x2.0mm -83.1,-50.7 r180 bottom
TP6 "TestPoint" TestPoint_Pad_2.0x2.0mm 33.9,-15.95 r180 bottom
U1 "TPD4EUSB30" USON-10_2.5x1.0mm_P0.5mm -40.8,-32.885 r270 top
U2 "TPD4EUSB30" USON-10_2.5x1.0mm_P0.5mm -46.8,-32.885 r270 top
U3 "MagJack-A70-112-331N126" TRJG0926HENL -43.2,-45.1 r0 top
U4 "TPD4EUSB30" USON-10_2.5x1.0mm_P0.5mm -2.95,-29.4 r90 top
U5 "74LVC1G07SE-7" SOT-353_SC-70-5 -80.6,-47.9 r270 top
U6 "USB2514B-I/M2" QFN-36-1EP_6x6mm_P0.5mm_EP3.7x3.7mm -16.596,-32.368 r90 top
U7 "AP22653W6" SOT-23-6 -8.7,-26.1 r270 top
U8 "PCF85063AT/AAZ" SOIC-8_3.9x4.9mm_P1.27mm -87.2,-14.85 r180 top
U9 "74LVC1G07SE-7" SOT-353_SC-70-5 4.5,21.7 r180 top
U11 "EMC2301-1-ACZL-TR" MSOP-8_3x3mm_P0.65mm 9.8,29.4 r0 top
U12 "RT9742SNGV" SOT-23 -82.1,-43.9 r90 top
U13 "FSUSB42MUX" MSOP-10_3x3mm_P0.5mm -18.9,-21.1 r0 top
U14 "74LVC1G07SE-7" SOT-353_SC-70-5 -68.582,-13.072 r0 top
U15 "AP64501SP-13" SOIC-8-1EP_3.9x4.9mm_P1.27mm_EP2.95x4.9mm_Mask2.71x3.4mm_ThermalVias 32.15,-20.663 r90 top
U16 "AP64501SP-13" SOIC-8-1EP_3.9x4.9mm_P1.27mm_EP2.95x4.9mm_Mask2.71x3.4mm_ThermalVias 32.2,10.05 r90 top
U18 "RT9742GGJ5" SOT-23-5 7.599,-22.156 r180 top
Y1 "24MHz" Crystal_SMD_HC49-SD -26.9,-28.8 r90 top
Y2 "X32K768S301" Crystal_SMD_3215-2Pin_3.2x1.5mm -81.35,-16.4 r90 top

## Footprints (in the part's own frame and the unit in brackets; to place one, negate y for a bottom-side part, rotate by r counter-clockwise, add the part's x,y. Pads: shape width x height; smd on the part's side, far side on the other; paste and mask are expansions set on the pad)
BarrelJack_Horizontal [mm]
  rrect100% 2.8x5 hole 3 slot 0.8 at 0 deg paste-5: 1(0,0)
  rrect25% 2.8x5 hole 3 slot 0.8 at 0 deg paste-5: 2(-5.8,0)
  rrect25% 5x2.8 hole 0.8 slot 3 at 0 deg paste-5: 3(-3,-4.8)
  silkscreen extent -13.8,-4.6 1.1,4.8
BatteryHolder_Keystone_3034_1x20mm [mm]
  rect 1.27x5.08 smd mask+0: 1(-10.985,0) 1(10.985,0)
  rect 3.96x3.96 smd mask+0: 2(0,0)
  silkscreen extent -10.78,-9 10.78,7.54
C_0402_1005Metric [mm]
  rrect25% 0.59x0.64 smd mask+0: 1(-0.485,0) 2(0.485,0)
C_0805_2012Metric [mm]
  rrect25% 0.975x1.4 smd mask+0: 1(-0.937,0) 2(0.937,0)
  silkscreen extent -0.26,-0.71 0.26,0.71
CP_EIA-7343-31_Kemet-D [mm]
  rrect12% 2.075x2.55 smd mask+0: 1(-3.113,0) 2(3.113,0)
  silkscreen extent -4.41,-2.26 3.65,2.26
Crystal_SMD_3215-2Pin_3.2x1.5mm [mm]
  rect 1x1.8 smd mask+0: 1(1.25,0) 2(-1.25,0)
  silkscreen extent -0.67,-0.87 0.67,0.87
Crystal_SMD_HC49-SD [mm]
  rect 4.5x2 smd mask+0: 1(-4.25,0) 2(4.25,0)
  silkscreen extent -6.7,-2.55 5.9,2.55
D_SOT-23_ANK [mm]
  rect 0.9x0.8 smd mask+0: 1(1,0) 2(-1,0.95) Un1(-1,-0.95)
  silkscreen extent -1.4,-1.58 0.76,1.58
Diodes_PowerDI3333-8 [mm]
  rect 0.7x0.42 smd mask+0: 1(-1.5,0.975) 2(-1.5,0.325) 3(-1.5,-0.325) 4(-1.5,-0.975)
  rect 1.71x2.37 smd paste-2.37 mask+0: 5(0.455,0)
  rect 0.7x0.42 on Top Paste mask-0.7: Un1(1.5,-0.325) Un3(1.5,0.975) Un6(1.5,0.325) Un7(1.5,-0.975)
  rect 0.6x1 on Top Paste mask-1: Un2(0.73,-0.565) Un4(0.02,0.565) Un5(0.73,0.565) Un8(0.02,-0.565)
  F.Cu region: 1.85,0.765 1.31,0.765 1.31,1.185 1.85,1.185
  F.Cu region: 1.85,0.115 1.31,0.115 1.31,0.535 1.85,0.535
  F.Cu region: 1.85,-0.535 1.31,-0.535 1.31,-0.115 1.85,-0.115
  F.Cu region: 1.85,-1.185 1.31,-1.185 1.31,-0.765 1.85,-0.765
  silkscreen extent -2,-1.77 1.77,1.77
"EDAC 690-019-298-412" [mm]
  rect 0.3x2.6 smd mask+0: 1(4.5,0.73) 2(4,0.73) 3(3.5,0.73) 4(3,0.73) 5(2.5,0.73) 6(2,0.73) 7(1.5,0.73) 8(1,0.73) 9(0.5,0.73) 10(0,0.73) 11(-0.5,0.73) 12(-1,0.73) 13(-1.5,0.73) 14(-2,0.73) 15(-2.5,0.73) 16(-3,0.73) 17(-3.5,0.73) 18(-4,0.73) 19(-4.5,0.73)
  rrect100% 1.5x3.3 hole 2.7 slot 0.9 at 0 deg paste-3.3: SH1(7.25,0) SH2(-7.25,0)
  rrect100% 1.5x2.3 hole 1.7 slot 0.9 at 0 deg paste-2.3: SH3(-7.25,-5.96) SH4(7.25,-5.96)
  silkscreen extent -8.1,-9.55 8.1,2.6
FanPinHeader_1x04_P2.54mm_Vertical [mm]
  rect 2.03x1.73 hole 1.02 paste-2.03: 1(0,0)
  rrect100% 1.73x2.03 hole 1.02 paste-2.03: 2(2.54,0) 3(5.08,0) 4(7.62,0)
  round 1.1 hole 1.1 paste-1.1: Un1(5.08,2.16)
  silkscreen extent -1.35,-3.4 8.95,2.6
Hirose_FH12-22S-0.5SH_1x22-1MP_P0.50mm_Horizontal [mm]
  rect 0.3x1.3 smd mask+0: 1(5.25,1.85) 2(4.75,1.85) 3(4.25,1.85) 4(3.75,1.85) 5(3.25,1.85) 6(2.75,1.85) 7(2.25,1.85) 8(1.75,1.85) 9(1.25,1.85) 10(0.75,1.85) 11(0.25,1.85) 12(-0.25,1.85) 13(-0.75,1.85) 14(-1.25,1.85) 15(-1.75,1.85) 16(-2.25,1.85) 17(-2.75,1.85) 18(-3.25,1.85) 19(-3.75,1.85) 20(-4.25,1.85) 21(-4.75,1.85) 22(-5.25,1.85)
  rect 1.8x2.2 smd mask+0: MP(-7.15,-1.4) MP(7.15,-1.4)
  silkscreen extent -7.15,-4.5 7.15,2.5
L_Bourns_SRN6045TA [mm]
  rect 2.35x5.1 smd mask+0: 1(-2.075,0) 2(2.075,0)
  silkscreen extent -3.1,-3.1 3.1,3.1
LED_0603_1608Metric [mm]
  rrect25% 0.875x0.95 smd mask+0: 1(-0.787,0) 2(0.787,0)
  silkscreen extent -1.49,-0.73 0.8,0.73
MOLEX_USB_67298-4090 [mm]
  round 1.5 hole 1 paste-1.5: 1(-3.5,5.33) 2(-1,5.33) 3(1,5.33) 4(3.5,5.33) 5(-3.5,2.71) 6(-1,2.71) 7(1,2.71) 8(3.5,2.71)
  round 3.45 hole 2.3 paste-3.45: MT1(-6.57,0) MT2(6.57,0) MT3(-6.57,5.68) MT4(6.57,5.68)
  silkscreen extent -6.95,-10.29 6.95,7
MountingHole_2.7mm_M2.5 [mm]
  round 2.7 hole 2.7 paste-2.7 mask+1.7: Un1(0,0)
MSOP-8_3x3mm_P0.65mm [mm]
  rrect25% 1.625x0.5 smd mask+0: 1(-2.113,0.975) 2(-2.113,0.325) 3(-2.113,-0.325) 4(-2.113,-0.975) 5(2.113,-0.975) 6(2.113,-0.325) 7(2.113,0.325) 8(2.113,0.975)
  silkscreen extent -2.93,-1.61 1.5,1.61
MSOP-10_3x3mm_P0.5mm [mm]
  rect 1.4x0.3 smd mask+0: 1(-2.2,1) 2(-2.2,0.5) 3(-2.2,0) 4(-2.2,-0.5) 5(-2.2,-1) 6(2.2,-1) 7(2.2,-0.5) 8(2.2,0) 9(2.2,0.5) 10(2.2,1)
  silkscreen extent -2.9,-1.68 1.68,1.68
PCIex1-36 [mm]
  rect 1.3x1.3 hole 0.7 paste-1.3: A1(0,0)
  round 1.3 hole 0.7 paste-1.3: A2(1,2) A3(2,0) A4(3,2) A5(4,0) A6(5,2) A7(6,0) A8(7,2) A9(8,0) A10(9,2) A11(10,0) A12(13,2) A13(14,0) A14(15,2) A15(16,0) A16(17,2) A17(18,0) A18(19,2) B1(0,-2.5) B2(1,-4.5) B3(2,-2.5) B4(3,-4.5) B5(4,-2.5) B6(5,-4.5) B7(6,-2.5) B8(7,-4.5) B9(8,-2.5) B10(9,-4.5) B11(10,-2.5) B12(13,-4.5) B13(14,-2.5) B14(15,-4.5) B15(16,-2.5) B16(17,-4.5) B17(18,-2.5) B18(19,-4.5)
  round 2.35 hole 2.35 paste-2.35: Un1(11.65,-1.25) Un2(20.8,-1.25)
  silkscreen extent -2.85,-6.35 22.15,2.45
PinHeader_1x03_P2.54mm_Vertical [mm]
  rect 1.7x1.7 hole 1 paste-1.7: 1(0,0)
  rrect100% 1.7x1.7 hole 1 paste-1.7: 2(0,-2.54) 3(0,-5.08)
  silkscreen extent -1.33,-6.41 1.33,1.33
PinHeader_2x02_P2.54mm_Vertical [mm]
  rect 1.7x1.7 hole 1 paste-1.7: 1(0,0)
  rrect100% 1.7x1.7 hole 1 paste-1.7: 2(2.54,0) 3(0,-2.54) 4(2.54,-2.54)
  silkscreen extent -1.33,-3.87 3.87,1.33
PinHeader_2x05_P2.54mm_Vertical [mm]
  rect 1.7x1.7 hole 1 paste-1.7: 1(0,0)
  rrect100% 1.7x1.7 hole 1 paste-1.7: 2(2.54,0) 3(0,-2.54) 4(2.54,-2.54) 5(0,-5.08) 6(2.54,-5.08) 7(0,-7.62) 8(2.54,-7.62) 9(0,-10.16) 10(2.54,-10.16)
  silkscreen extent -1.33,-11.49 3.87,1.33
PinHeader_2x07_P2.54mm_Vertical [mm]
  rect 1.7x1.7 hole 1 paste-1.7: 1(0,0)
  rrect100% 1.7x1.7 hole 1 paste-1.7: 2(2.54,0) 3(0,-2.54) 4(2.54,-2.54) 5(0,-5.08) 6(2.54,-5.08) 7(0,-7.62) 8(2.54,-7.62) 9(0,-10.16) 10(2.54,-10.16) 11(0,-12.7) 12(2.54,-12.7) 13(0,-15.24) 14(2.54,-15.24)
  silkscreen extent -1.33,-16.57 3.87,1.33
PinHeader_2x20_P2.54mm_Vertical [mm]
  rect 1.7x1.7 hole 1 paste-1.7: 1(0,0)
  rrect100% 1.7x1.7 hole 1 paste-1.7: 2(2.54,0) 3(0,-2.54) 4(2.54,-2.54) 5(0,-5.08) 6(2.54,-5.08) 7(0,-7.62) 8(2.54,-7.62) 9(0,-10.16) 10(2.54,-10.16) 11(0,-12.7) 12(2.54,-12.7) 13(0,-15.24) 14(2.54,-15.24) 15(0,-17.78) 16(2.54,-17.78) 17(0,-20.32) 18(2.54,-20.32) 19(0,-22.86) 20(2.54,-22.86) 21(0,-25.4) 22(2.54,-25.4) 23(0,-27.94) 24(2.54,-27.94) 25(0,-30.48) 26(2.54,-30.48) 27(0,-33.02) 28(2.54,-33.02) 29(0,-35.56) 30(2.54,-35.56) 31(0,-38.1) 32(2.54,-38.1) 33(0,-40.64) 34(2.54,-40.64) 35(0,-43.18) 36(2.54,-43.18) 37(0,-45.72) 38(2.54,-45.72) 39(0,-48.26) 40(2.54,-48.26)
  silkscreen extent -1.33,-49.59 3.87,1.33
QFN-36-1EP_6x6mm_P0.5mm_EP3.7x3.7mm [mm]
  rrect25% 0.825x0.25 smd mask+0: 1(-2.937,2) 2(-2.937,1.5) 3(-2.937,1) 4(-2.937,0.5) 5(-2.937,0) 6(-2.937,-0.5) 7(-2.937,-1) 8(-2.937,-1.5) 9(-2.937,-2) 19(2.937,-2) 20(2.937,-1.5) 21(2.937,-1) 22(2.937,-0.5) 23(2.937,0) 24(2.937,0.5) 25(2.937,1) 26(2.937,1.5) 27(2.937,2)
  rrect25% 0.25x0.825 smd mask+0: 10(-2,-2.937) 11(-1.5,-2.937) 12(-1,-2.937) 13(-0.5,-2.937) 14(0,-2.937) 15(0.5,-2.937) 16(1,-2.937) 17(1.5,-2.937) 18(2,-2.937) 28(2,2.937) 29(1.5,2.937) 30(1,2.937) 31(0.5,2.937) 32(0,2.937) 33(-0.5,2.937) 34(-1,2.937) 35(-1.5,2.937) 36(-2,2.937)
  rrect7% 3.7x3.7 smd paste-3.7 mask+0: 37(0,0)
  rrect25% 0.99x0.99 on Top Paste mask-0.99: Un1(0,-1.23) Un2(-1.23,1.23) Un3(1.23,-1.23) Un4(0,1.23) Un5(-1.23,0) Un6(1.23,1.23) Un7(0,0) Un8(-1.23,-1.23) Un9(1.23,0)
  silkscreen extent -3.11,-3.11 3.11,3.11
R_0402_1005Metric [mm]
  rrect25% 0.59x0.64 smd mask+0: 1(-0.485,0) 2(0.485,0)
R_0805_2012Metric_Pad1.15x1.40mm_HandSolder [mm]
  rrect22% 1.15x1.4 smd mask+0: 1(-1.025,0) 2(1.025,0)
  silkscreen extent -0.26,-0.71 0.26,0.71
Raspberry-Pi-4-Compute-Module [mm]
  rect 0.7x0.2 smd mask+0: 1(-2,31.3) 2(1.08,31.3) 3(-2,30.9) 4(1.08,30.9) 5(-2,30.5) 6(1.08,30.5) 7(-2,30.1) 8(1.08,30.1) 9(-2,29.7) 10(1.08,29.7) 11(-2,29.3) 12(1.08,29.3) 13(-2,28.9) 14(1.08,28.9) 15(-2,28.5) 16(1.08,28.5) 17(-2,28.1) 18(1.08,28.1) 19(-2,27.7) 20(1.08,27.7) 21(-2,27.3) 22(1.08,27.3) 23(-2,26.9) 24(1.08,26.9) 25(-2,26.5) 26(1.08,26.5) 27(-2,26.1) 28(1.08,26.1) 29(-2,25.7) 30(1.08,25.7) 31(-2,25.3) 32(1.08,25.3) 33(-2,24.9) 34(1.08,24.9) 35(-2,24.5) 36(1.08,24.5) 37(-2,24.1) 38(1.08,24.1) 39(-2,23.7) 40(1.08,23.7) 41(-2,23.3) 42(1.08,23.3) 43(-2,22.9) 44(1.08,22.9) 45(-2,22.5) 46(1.08,22.5) 47(-2,22.1) 48(1.08,22.1) 49(-2,21.7) 50(1.08,21.7) 51(-2,21.3) 52(1.08,21.3) 53(-2,20.9) 54(1.08,20.9) 55(-2,20.5) 56(1.08,20.5) 57(-2,20.1) 58(1.08,20.1) 59(-2,19.7) 60(1.08,19.7) 61(-2,19.3) 62(1.08,19.3) 63(-2,18.9) 64(1.08,18.9) 65(-2,18.5) 66(1.08,18.5) 67(-2,18.1) 68(1.08,18.1) 69(-2,17.7) 70(1.08,17.7) 71(-2,17.3) 72(1.08,17.3) 73(-2,16.9) 74(1.08,16.9) 75(-2,16.5) 76(1.08,16.5) 77(-2,16.1) 78(1.08,16.1) 79(-2,15.7) 80(1.08,15.7) 81(-2,15.3) 82(1.08,15.3) 83(-2,14.9) 84(1.08,14.9) 85(-2,14.5) 86(1.08,14.5) 87(-2,14.1) 88(1.08,14.1) 89(-2,13.7) 90(1.08,13.7) 91(-2,13.3) 92(1.08,13.3) 93(-2,12.9) 94(1.08,12.9) 95(-2,12.5) 96(1.08,12.5) 97(-2,12.1) 98(1.08,12.1) 99(-2,11.7) 100(1.08,11.7) 101(31.92,31.3) 102(35,31.3) 103(31.92,30.9) 104(35,30.9) 105(31.92,30.5) 106(35,30.5) 107(31.92,30.1) 108(35,30.1) 109(31.92,29.7) 110(35,29.7) 111(31.92,29.3) 112(35,29.3) 113(31.92,28.9) 114(35,28.9) 115(31.92,28.5) 116(35,28.5) 117(31.92,28.1) 118(35,28.1) 119(31.92,27.7) 120(35,27.7) 121(31.92,27.3) 122(35,27.3) 123(31.92,26.9) 124(35,26.9) 125(31.92,26.5) 126(35,26.5) 127(31.92,26.1) 128(35,26.1) 129(31.92,25.7) 130(35,25.7) 131(31.92,25.3) 132(35,25.3) 133(31.92,24.9) 134(35,24.9) 135(31.92,24.5) 136(35,24.5) 137(31.92,24.1) 138(35,24.1) 139(31.92,23.7) 140(35,23.7) 141(31.92,23.3) 142(35,23.3) 143(31.92,22.9) 144(35,22.9) 145(31.92,22.5) 146(35,22.5) 147(31.92,22.1) 148(35,22.1) 149(31.92,21.7) 150(35,21.7) 151(31.92,21.3) 152(35,21.3) 153(31.92,20.9) 154(35,20.9) 155(31.92,20.5) 156(35,20.5) 157(31.92,20.1) 158(35,20.1) 159(31.92,19.7) 160(35,19.7) 161(31.92,19.3) 162(35,19.3) 163(31.92,18.9) 164(35,18.9) 165(31.92,18.5) 166(35,18.5) 167(31.92,18.1) 168(35,18.1) 169(31.92,17.7) 170(35,17.7) 171(31.92,17.3) 172(35,17.3) 173(31.92,16.9) 174(35,16.9) 175(31.92,16.5) 176(35,16.5) 177(31.92,16.1) 178(35,16.1) 179(31.92,15.7) 180(35,15.7) 181(31.92,15.3) 182(35,15.3) 183(31.92,14.9) 184(35,14.9) 185(31.92,14.5) 186(35,14.5) 187(31.92,14.1) 188(35,14.1) 189(31.92,13.7) 190(35,13.7) 191(31.92,13.3) 192(35,13.3) 193(31.92,12.9) 194(35,12.9) 195(31.92,12.5) 196(35,12.5) 197(31.92,12.1) 198(35,12.1) 199(31.92,11.7) 200(35,11.7)
  round 2.7 hole 2.7 paste-2.7 mask+1.7: Un1(0,0) Un2(33,48) Un3(33,0) Un4(0,48)
  silkscreen extent -3.5,-3.5 36.5,51.5
SDCARD_MOLEX_503398-1892 [mm]
  rect 0.7x1.1 smd mask+0: 1(-2.38,5.625) 2(-1.28,5.625) 3(-0.18,5.625) 4(0.92,5.625) 5(2.02,5.625) 6(3.12,5.625) 7(4.22,5.625) 8(5.32,5.625)
  rect 0.9x0.93 smd mask+0: 9(-4.17,-6.84)
  rect 1.05x0.78 smd mask+0: 10(0.095,-6.915)
  rect 0.7x3.33 smd mask+0: 11(-6.48,-5.64) 11(6.48,-5.64)
  rect 1.14x1.83 smd mask+0: 11(-6.26,5.61)
  rect 0.86x2.8 smd mask+0: 11(6.4,5.125)
  silkscreen extent -6.55,-7.02 6.55,7.57
SOIC-8-1EP_3.9x4.9mm_P1.27mm_EP2.95x4.9mm_Mask2.71x3.4mm_ThermalVias [mm]
  rrect25% 1.775x0.6 smd mask+0: 1(-2.562,1.905) 2(-2.562,0.635) 3(-2.562,-0.635) 4(-2.562,-1.905) 5(2.562,-1.905) 6(2.562,-0.635) 7(2.562,0.635) 8(2.562,1.905)
  round 0.5 hole 0.25 paste-0.5 mask-0.5: 9(-0.65,1.95) 9(-0.65,-0.65) 9(-0.65,0.65) 9(-0.65,-1.95) 9(0.65,1.95) 9(0.65,-0.65) 9(0.65,0.65) 9(0.65,-1.95)
  rect 2.95x4.9 smd paste-4.9 mask-4.9: 9(0,0)
  rect 1.8x4.4 smd far side paste-4.4 mask+0.1: 9(0,0)
  rrect22% 1.13x1.42 on Top Paste mask-1.42: Un1(0.68,-0.85) Un3(0.68,0.85) Un4(-0.68,-0.85) Un5(-0.68,0.85)
  rect 2.71x3.4 on Top Solder paste-3.4 mask-3.4: Un2(0,0)
  silkscreen extent -3.45,-2.56 1.95,2.56
SOIC-8_3.9x4.9mm_P1.27mm [mm]
  rrect25% 1.95x0.6 smd mask+0: 1(-2.475,1.905) 2(-2.475,0.635) 3(-2.475,-0.635) 4(-2.475,-1.905) 5(2.475,-1.905) 6(2.475,-0.635) 7(2.475,0.635) 8(2.475,1.905)
  silkscreen extent -3.45,-2.56 1.95,2.56
SOT-23 [mm]
  rect 0.9x0.8 smd mask+0: 1(-1,0.95) 2(-1,-0.95) 3(1,0)
  silkscreen extent -1.4,-1.58 0.76,1.58
SOT-23-5 [mm]
  rect 1.06x0.65 smd mask+0: 1(-1.1,0.95) 2(-1.1,0) 3(-1.1,-0.95) 4(1.1,-0.95) 5(1.1,0.95)
  silkscreen extent -1.55,-1.61 0.9,1.61
SOT-23-6 [mm]
  rect 1.06x0.65 smd mask+0: 1(-1.1,0.95) 2(-1.1,0) 3(-1.1,-0.95) 4(1.1,-0.95) 5(1.1,0) 6(1.1,0.95)
  silkscreen extent -1.55,-1.61 0.9,1.61
SOT-353_SC-70-5 [mm]
  rect 0.65x0.4 smd mask+0: 1(-0.95,0.65) 2(-0.95,0) 3(-0.95,-0.65) 4(0.95,-0.65) 5(0.95,0.65)
  silkscreen extent -1.2,-1.16 0.7,1.16
TE_171826-4 [mm]
  rect 1.408x1.408 hole 0.9 paste-1.408: 1(-3.75,4.55)
  round 1.408 hole 0.9 paste-1.408: 2(-1.25,4.55) 3(1.25,4.55) 4(3.75,4.55)
  silkscreen extent -5,-6.75 5,6.75
TestPoint_Pad_2.0x2.0mm [mm]
  rect 2x2 smd paste-2 mask+0: 1(0,0)
  silkscreen extent -1.2,-1.2 1.2,1.2
TRJG0926HENL [mm]
  rrect17% 1.5x1.5 hole 0.9 paste-1.5: 1(-5.715,8.89)
  round 1.5 hole 0.9 paste-1.5: 2(-4.445,6.35) 3(-3.175,8.89) 4(-1.905,6.35) 5(-0.635,8.89) 6(0.635,6.35) 7(1.905,8.89) 8(3.175,6.35) 9(4.445,8.89) 10(5.715,6.35) 11(-5.715,3.83) 12(-3.175,2.56) 13(3.175,2.56) 14(5.715,3.83)
  round 1.5 hole 1.02 paste-1.5: 15(-6.63,-4.06) 16(-4.09,-4.06) 17(4.09,-4.06) 18(6.63,-4.06)
  round 2.5 hole 1.7 paste-2.5: 19(-7.875,3.05) 20(7.875,3.05)
  round 3.2 hole 3.2 paste-3.2: Un1(-5.715,0) Un2(5.715,0)
  silkscreen extent -8.25,-11.15 8.12,10.62
USB_Micro-B_EDAC_UCON00686 [mm]
  rect 0.4x1.75 smd mask+0: 1(-1.3,2.82) 2(-0.65,2.82) 3(0,2.82) 4(0.65,2.82) 5(1.3,2.82)
  rect 1.825x0.7 smd mask+0: 6(-2.987,1.7) 6(2.987,1.7)
  rect 2x1.4 smd mask+0: 6(-2.85,3.06) 6(2.9,3.06)
  rrect100% 1.3x1.7 hole 0.7 slot 1.2 at 90 deg paste-1.7: 6(-2.725,0) 6(2.725,0)
  rect 1.3x2 smd mask+0: 6(-2.725,0.93) 6(2.725,0.93)
  rrect100% 1x1.4 hole 0.65 slot 1.05 at 90 deg paste-1.4: 6(-2.425,3.03) 6(2.425,3.03)
  rect 1.425x2.5 smd mask+0: 6(-0.962,-0.25) 6(0.962,-0.25)
  silkscreen extent -4.15,-1.62 4.15,4.43
USON-10_2.5x1.0mm_P0.5mm [mm]
  rect 0.55x0.3 smd mask+0: 1(-0.385,1) 2(-0.385,0.5) 4(-0.385,-0.5) 5(-0.385,-1) 6(0.385,-1) 7(0.385,-0.5) 9(0.385,0.5) 10(0.385,1)
  rect 0.55x0.4 smd mask+0: 3(-0.385,0) 8(0.385,0)
  silkscreen extent -0.8,-1.4 0.5,1.4

## Part data
BT1: library part BatteryHolder_Keystone_3034_1x20mm, "Keystone 3034 SMD battery holder for 2020, 2025 and 2032 coincell batteries. http://www.keyelco.com/product-pdf.cfm?p=798"
C1 C3 C4 C7 C8 C9 C11 C12 C13 C14 C15 C22 C23 C24 C29 C36 C40 C46 C57 C58 C59 C60 C61 C62 C63 C64 C65: library part C_0402_1005Metric, "Capacitor SMD 0402 (1005 Metric), square (rectangular) end terminal, IPC_7351 nominal, (Body size source: http://www.tortai-tech.com/upload/download/2011102023233369053.pdf), generated with kicad-footprint-generator"
C2 C5 C6 C10 C17 C19 C20 C21 C25 C26 C27 C28 C30 C31 C32 C33 C34 C35 C37 C38 C39 C41 C42 C43 C44 C47 C49 C51 C52: library part C_0805_2012Metric, "Capacitor SMD 0805 (2012 Metric), square (rectangular) end terminal, IPC_7351 nominal, (Body size source: https://docs.google.com/spreadsheets/d/1BsfQQcO9C6DZCsRaXUlFlo91Tg2WpOkGARC1WS5S8t0/edit?usp=sharing), generated with kicad-footprint-generator"
C16 C18 C45: library part CP_EIA-7343-31_Kemet-D, "Tantalum Capacitor SMD Kemet-D (7343-31 Metric), IPC_7351 nominal, (Body size from: http://www.kemet.com/Lists/ProductCatalog/Attachments/253/KEM_TC101_STD.pdf), generated with kicad-footprint-generator"
D1 D2: library part LED_0603_1608Metric, "LED SMD 0603 (1608 Metric), square (rectangular) end terminal, IPC_7351 nominal, (Body size source: http://www.tortai-tech.com/upload/download/2011102023233369053.pdf), generated with kicad-footprint-generator"
D3 U12: library part SOT-23, "SOT-23, Standard"
D4: library part D_SOT-23_ANK, "SOT-23, Single Diode"
H1 H2 H3 H4 H5 H6 H7 H8: library part MountingHole_2.7mm_M2.5, "Mounting Hole 2.7mm, no annular, M2.5"
J1 J3: library part PinHeader_1x03_P2.54mm_Vertical, "Through hole straight pin header, 1x03, 2.54mm pitch, single row"
J2: library part PinHeader_2x07_P2.54mm_Vertical, "Through hole straight pin header, 2x07, 2.54mm pitch, double rows"
J4 J5 J15 J16: library part Hirose_FH12-22S-0.5SH_1x22-1MP_P0.50mm_Horizontal, "Molex FH12, FFC/FPC connector, FH12-22S-0.5SH, 22 Pins per row (https://www.hirose.com/product/en/products/FH12/FH12-24S-0.5SH(55)/), generated with kicad-footprint-generator"
J6 J9: library part PinHeader_2x02_P2.54mm_Vertical, "Through hole straight pin header, 2x02, 2.54mm pitch, double rows"
J7: library part SDCARD_MOLEX_503398-1892
J8: library part PinHeader_2x20_P2.54mm_Vertical, "Through hole straight pin header, 2x20, 2.54mm pitch, double rows"
J10 J22: library part "EDAC 690-019-298-412"
J11: library part USB_Micro-B_EDAC_UCON00686, "Micro USB Type B 10103594-0001LF, http://cdn.amphenol-icc.com/media/wysiwyg/files/drawing/10103594.pdf"
J12: library part PCIex1-36
J13: library part MOLEX_USB_67298-4090
J14: library part PinHeader_2x05_P2.54mm_Vertical, "Through hole straight pin header, 2x05, 2.54mm pitch, double rows"
J17: library part FanPinHeader_1x04_P2.54mm_Vertical, "4-pin CPU fan Through hole pin header, e.g. for Wieson part number 2366C888-007 Molex 47053-1000, Foxconn HF27040-M1, Tyco 1470947-1 or equivalent, see http://www.formfactors.org/developer%5Cspecs%5Crev1_2_public.pdf"
J19: library part BarrelJack_Horizontal, "DC Barrel Jack"
J20: library part TE_171826-4
L3 L5: library part L_Bourns_SRN6045TA, "http://www.bourns.com/docs/product-datasheets/srn6045ta.pdf"
Module1: library part Raspberry-Pi-4-Compute-Module, "Raspberry Pi 4 Compute Module"
Q1: library part Diodes_PowerDI3333-8, "Diodes Incorporated PowerDI3333-8, Plastic Dual Flat No Lead Package, 3.3x3.3x0.8mm Body, https://www.diodes.com/assets/Package-Files/PowerDI3333-8.pdf"
R1 R2 R3 R6 R7 R8 R9 R10 R11 R12 R13 R14 R15 R16 R17 R18 R19 R20 R21 R22 R23 R24 R25 R26 R27 R28 R29 R30 R36: library part R_0402_1005Metric, "Resistor SMD 0402 (1005 Metric), square (rectangular) end terminal, IPC_7351 nominal, (Body size source: http://www.tortai-tech.com/upload/download/2011102023233369053.pdf), generated with kicad-footprint-generator"
R4 R5: library part R_0805_2012Metric_Pad1.15x1.40mm_HandSolder, "Resistor SMD 0805 (2012 Metric), square (rectangular) end terminal, IPC_7351 nominal with elongated pad for handsoldering. (Body size source: https://docs.google.com/spreadsheets/d/1BsfQQcO9C6DZCsRaXUlFlo91Tg2WpOkGARC1WS5S8t0/edit?usp=sharing), generated with kicad-footprint-generator"
TP1 TP2 TP3 TP4 TP5 TP6: library part TestPoint_Pad_2.0x2.0mm, "SMD rectangular pad as test Point, square 2.0mm side length"
U1 U2 U4: library part USON-10_2.5x1.0mm_P0.5mm, "USON-10 2.5x1.0mm_ Pitch 0.5mm http://www.ti.com/lit/ds/symlink/tpd4e02b04.pdf"
U3: library part TRJG0926HENL, "https://p.globalsources.com/IMAGES/PDT/SPEC/690/K1160305690.pdf"
U5 U9 U14: library part SOT-353_SC-70-5, "SOT-353, SC-70-5"
U6: library part QFN-36-1EP_6x6mm_P0.5mm_EP3.7x3.7mm, "QFN, 36 Pin (http://ww1.microchip.com/downloads/en/DeviceDoc/36L_QFN_6x6_with_3_7x3_7_EP_Punch_Dimpled_4E_C04-0241A.pdf), generated with kicad-footprint-generator ipc_dfn_qfn_generator.py"
U7: library part SOT-23-6, "6-pin SOT-23 package"
U8: library part SOIC-8_3.9x4.9mm_P1.27mm, "SOIC, 8 Pin (JEDEC MS-012AA, https://www.analog.com/media/en/package-pcb-resources/package/pkg_pdf/soic_narrow-r/r_8.pdf), generated with kicad-footprint-generator ipc_gullwing_generator.py"
U11: library part MSOP-8_3x3mm_P0.65mm, "MSOP, 8 Pin (https://www.jedec.org/system/files/docs/mo-187F.pdf variant AA), generated with kicad-footprint-generator ipc_gullwing_generator.py"
U13: library part MSOP-10_3x3mm_P0.5mm, "10-Lead Plastic Micro Small Outline Package (MS) [MSOP] (see Microchip Packaging Specification 00000049BS.pdf)"
U15 U16: library part SOIC-8-1EP_3.9x4.9mm_P1.27mm_EP2.95x4.9mm_Mask2.71x3.4mm_ThermalVias, "SOIC, 8 Pin (http://www.ti.com/lit/ds/symlink/lm5017.pdf#page=31), generated with kicad-footprint-generator ipc_gullwing_generator.py"
U18: library part SOT-23-5, "5-pin SOT23 package"
Y1: library part Crystal_SMD_HC49-SD, "SMD Crystal HC-49-SD http://cdn-reichelt.de/documents/datenblatt/B400/xxx-HC49-SMD.pdf, 11.4x4.7mm^2 package"
Y2: library part Crystal_SMD_3215-2Pin_3.2x1.5mm, "SMD Crystal FC-135 https://support.epson.biz/td/api/doc_check.php?dl=brief_FC-135R_en.pdf"

## Via types
v1: diameter 0.45, hole 0.25, F.Cu to B.Cu, tented both sides, 782 vias

## Nets (pads, with @x,y where several pads share a name; then routed paths per layer and width w, separated by ;. In a path a pad name is that pad's centre, name@x,y a point inside that pad or via, vN(x,y) a via of type N, cw(c..) or ccw(c..) an arc to the next point about the centre after c; other vN are vias at no path point)
+1.8v: Module1.88 Module1.90 R4.1 | length 12.9
  F.Cu w0.2: Module1.88@-1.78,17.8 -1.2,17.8 -0.9,18.1 -0.9,18.2 ; Module1.90@-1.78,18.2 -0.9,18.2 ; R4.1@-1.225,26.4 -2.2,26.4 -2.8,25.8 -2.8,22.9 -2.1,22.2 -1.4,22.2 -0.6,21.4 -0.6,18.8 -0.9,18.5 -0.9,18.2